# Altium PCB Memory_SD_Card.PcbDoc
Units mil, origin at the board's own origin, x right, y up, seen from the top; angles counter-clockwise.
Board outline 5200 x 2300 mil, 2 copper layers (Top Layer, Bottom Layer), stack 61.756 mil thick; 20 components, 54 nets, 153 pads, 181 vias.
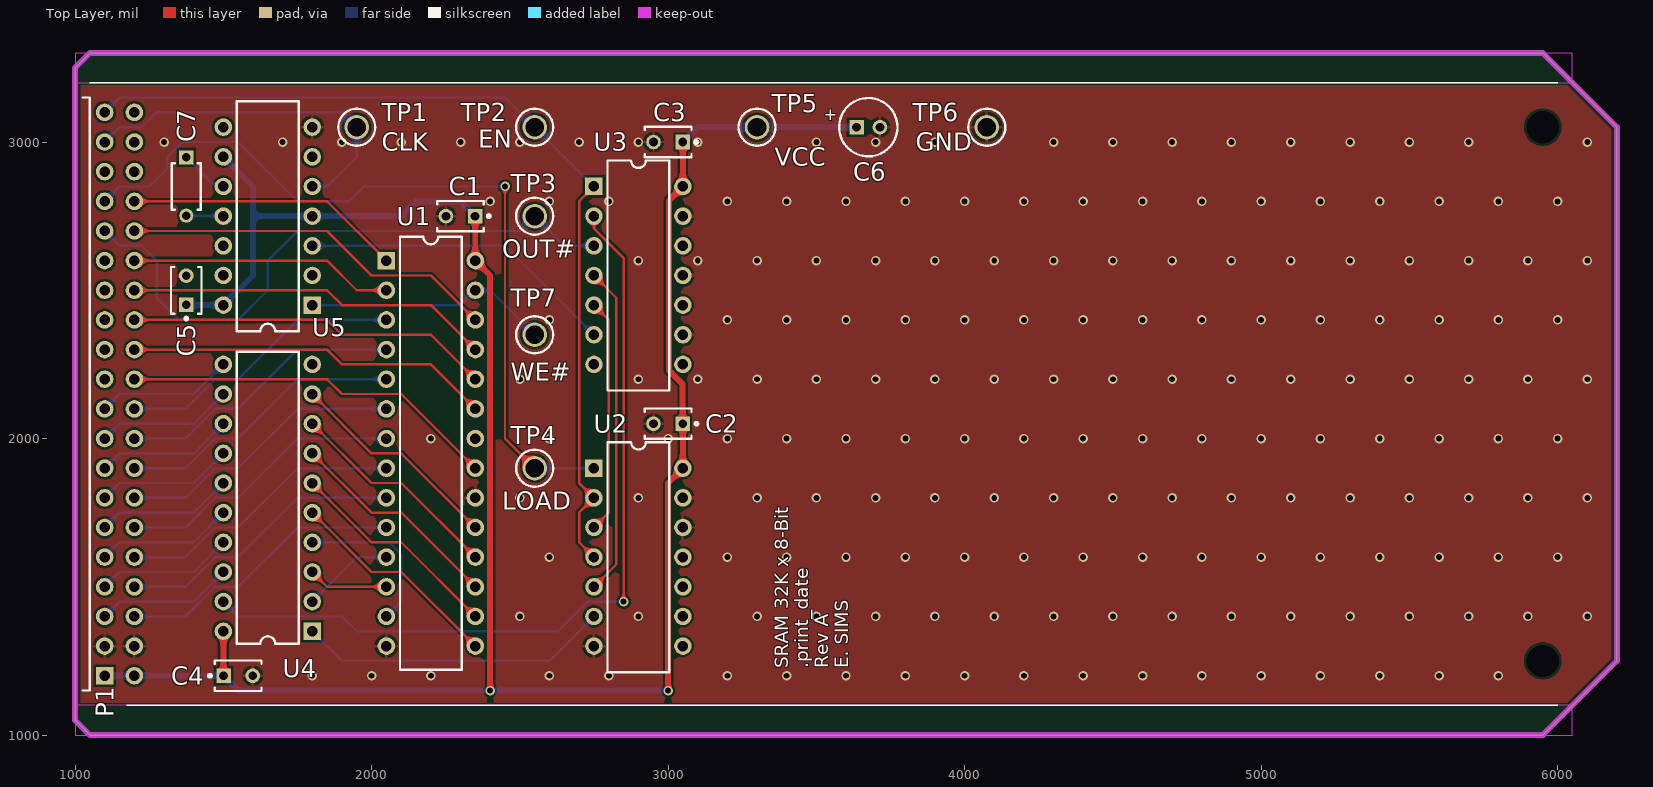
[diagram p0: Top Layer view]
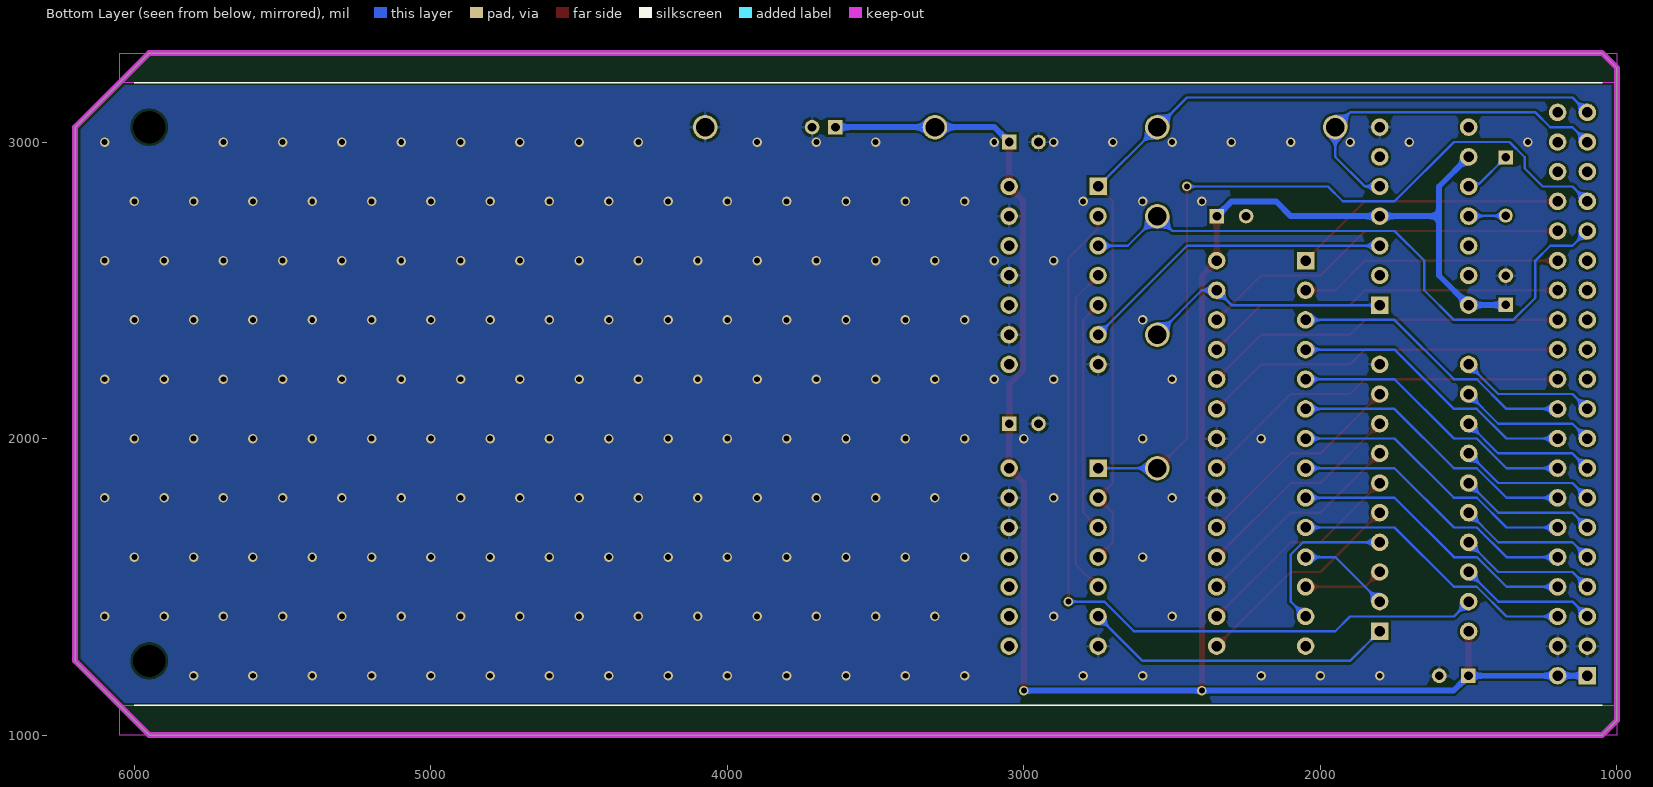
[diagram p1: Bottom Layer view, seen from below]

## Layer stack, top to bottom
Top Solder: solder mask 1, SM-001, Dk 4
Top Layer: signal copper 1.378
Dielectric 1: core 59, Core-043, Dk 4.3
Bottom Layer: signal copper 1.378
Bottom Solder: solder mask 1, SM-001, Dk 4

## Board outline
1000,1050 1050,1000 5950,1000 6200,1250 6200,3050 5950,3300 1050,3300 1000,3250

## Design rules (kind name [scope] priority, off if disabled: settings)
Clearance [All] p1: gap=8 ignorepadtopadclearanceinfootprint=FALSE
HoleSize [All] p1: absolutevalues=TRUE maxlimit=200 minlimit=12 maxpercent=80.000 minpercent=20.000
MinimumSolderMaskSliver [All] p1: minsoldermaskwidth=5
PolygonConnect [All] p1: thpad.connectstyle=Relief thpad.reliefconductorwidth=10 thpad.reliefentries=4 thpad.polygonreliefangle="90 Angle" thpad.airgapwidth=10 smdpad.connectstyle=Relief smdpad.reliefconductorwidth=10 smdpad.reliefentries=4 smdpad.polygonreliefangle="90 Angle" smdpad.airgapwidth=10 via.connectstyle=Direct via.reliefconductorwidth=10 via.reliefentries=4 via.polygonreliefangle="90 Angle" via.airgapwidth=10
RoutingVias [All] p1: holewidth=28 width=50 viastyle="Through Hole" minholewidth=28 minwidth=50 maxholewidth=28 maxwidth=50
SilkToSilkClearance [All] p1: silktosilkclearance=5
SilkToSolderMaskClearance [IsPad] p1: minsilkscreentomaskgap=5 clearancetoexposedcopper=TRUE
SolderMaskExpansion [All] p1: expansion=4 istentingtop=FALSE
Width [All] p1: maxlimit=20 minlimit=8 preferedwidth=8 minimp=50.000000 maximp=50.000000 favimp=50.000000
26 further rules are at their usual default settings.

## Classes and differential pairs
net class ADDR[0..14]: ADDR0 ADDR1 ADDR2 ADDR3 ADDR4 ADDR5 ADDR6 ADDR7 ADDR8 ADDR9 ADDR10 ADDR11 ADDR12 ADDR13 ADDR14
net class BUS[0..7]: BUS0 BUS1 BUS2 BUS3 BUS4 BUS5 BUS6 BUS7
component class MEM: C1 C2 C3 C4 C5 C7 TP7 U1 U2 U3 U4 U5
component class Top: C6 P1 TP1 TP2 TP3 TP4 TP5 TP6

## Components (designator, comment, footprint, x,y, rotation, side; value= is the part's Value field where it differs from the comment)
C1 "K104K15X7RF5TL2" VISH-K104K15X7RF5TL2 2300,2750 r180 top
C2 "K104K15X7RF5TL2" VISH-K104K15X7RF5TL2 3000,2050 r180 top
C3 "K104K15X7RF5TL2" VISH-K104K15X7RF5TL2 3000,3000 r180 top
C4 "K104K15X7RF5TL2" VISH-K104K15X7RF5TL2 1550,1200 r0 top
C5 "K104K15X7RF5TL2" VISH-K104K15X7RF5TL2 1375,2500 r90 top
C6 "Cap Pol5" C5x7 3675,3050 r0 top value=10uF
C7 "RDE5C1H220J0M1H03A" FP-RDE0M1-MFG 1375,2850 r270 top
P1 "Header 20X2H" HDR2X20H 1100,1200 r90 top locked
TP1 "CLK" KSTN-5011_V 1950,3050 r0 top
TP2 "EN" KSTN-5011_V 2550,3050 r0 top
TP3 "OUT#" KSTN-5011_V 2550,2750 r0 top
TP4 "LOAD" KSTN-5011_V 2550,1900 r0 top
TP5 "VCC" KSTN-5011_V 3300,3050 r0 top
TP6 "GND" KSTN-5011_V 4075,3050 r0 top
TP7 "WE#" KSTN-5011_V 2550,2350 r0 top
U1 "71256SA20TPG" JT028 2200,1950 r270 top
U2 "SN74LS08N" N014 2900,1600 r270 top
U3 "SN74LS04N" N014 2900,2550 r270 top
U4 "SN74LS245N" N020 1650,1800 r90 top
U5 "SN74121N" N014 1650,2750 r90 top

## Footprints (in the part's own frame and the unit in brackets; to place one, negate y for a bottom-side part, rotate by r counter-clockwise, add the part's x,y. Pads: shape width x height; smd on the part's side, far side on the other; paste and mask are expansions set on the pad)
C5x7 [mm] "Capacitor; 2 Leads"
  rect 1.25x1.25 hole 0.75: 1(-1,0)
  round 1.25 hole 0.75: 2(1,0)
  silkscreen extent -2.5,-2.5 2.5,2.5, body extent -2.5,-2.5 2.5,2.5, height 7
FP-RDE0M1-MFG [mm]
  rect 1.2x1.2 hole 0.7 paste-1000 mask+0: 1(-2.5,0)
  round 1.2 hole 0.7 paste-1000 mask+0: 2(2.5,0)
  silkscreen extent -2,-1.25 2,1.25, body extent -3.2,-1.35 3.2,1.35, height 0.25
HDR2X20H [mm] "Connector; Header; 20x2 Position; Right Angle"
  rect 1.5x1.5 hole 0.9: 1(0,0)
  round 1.5 hole 0.9: 2(0,-2.54) 3(2.54,0) 4(2.54,-2.54) 5(5.08,0) 6(5.08,-2.54) 7(7.62,0) 8(7.62,-2.54) 9(10.16,0) 10(10.16,-2.54) 11(12.7,0) 12(12.7,-2.54) 13(15.24,0) 14(15.24,-2.54) 15(17.78,0) 16(17.78,-2.54) 17(20.32,0) 18(20.32,-2.54) 19(22.86,0) 20(22.86,-2.54) 21(25.4,0) 22(25.4,-2.54) 23(27.94,0) 24(27.94,-2.54) 25(30.48,0) 26(30.48,-2.54) 27(33.02,0) 28(33.02,-2.54) 29(35.56,0) 30(35.56,-2.54) 31(38.1,0) 32(38.1,-2.54) 33(40.64,0) 34(40.64,-2.54) 35(43.18,0) 36(43.18,-2.54) 37(45.72,0) 38(45.72,-2.54) 39(48.26,0) 40(48.26,-2.54)
  silkscreen extent -1.27,1.27 49.53,1.91
JT028 [mm] "DIP; 28 Leads; Row Spacing 7.62 mm; Pitch 2.54 mm"
  rect 1.5x1.5 hole 0.9: 1(-16.51,-3.81)
  round 1.5 hole 0.9: 2(-13.97,-3.81) 3(-11.43,-3.81) 4(-8.89,-3.81) 5(-6.35,-3.81) 6(-3.81,-3.81) 7(-1.27,-3.81) 8(1.27,-3.81) 9(3.81,-3.81) 10(6.35,-3.81) 11(8.89,-3.81) 12(11.43,-3.81) 13(13.97,-3.81) 14(16.51,-3.81) 15(16.51,3.81) 16(13.97,3.81) 17(11.43,3.81) 18(8.89,3.81) 19(6.35,3.81) 20(3.81,3.81) 21(1.27,3.81) 22(-1.27,3.81) 23(-3.81,3.81) 24(-6.35,3.81) 25(-8.89,3.81) 26(-11.43,3.81) 27(-13.97,3.81) 28(-16.51,3.81)
  silkscreen extent -18.55,-2.65 18.55,2.65
KSTN-5011_V [mm] "Test Point, Dia 3.17mm"
  round 2.1 hole 1.6: 1(0,0)
  silkscreen extent -1.59,-1.58 1.59,1.58, body extent -1.59,-1.59 1.59,1.59, height 8.13
N014 [mm] "DIP; 14 Leads; Row Spacing 7.62 mm; Pitch 2.54 mm"
  rect 1.5x1.5 hole 0.9: 1(-7.62,-3.81)
  round 1.5 hole 0.9: 2(-5.08,-3.81) 3(-2.54,-3.81) 4(0,-3.81) 5(2.54,-3.81) 6(5.08,-3.81) 7(7.62,-3.81) 8(7.62,3.81) 9(5.08,3.81) 10(2.54,3.81) 11(0,3.81) 12(-2.54,3.81) 13(-5.08,3.81) 14(-7.62,3.81)
  silkscreen extent -9.85,-2.65 9.85,2.65, body extent -9.15,-5.08 9.15,5.12, height 7.88
N020 [mm] "DIP; 20 Leads; Row Spacing 7.62 mm; Pitch 2.54 mm"
  rect 1.5x1.5 hole 0.9: 1(-11.43,-3.81)
  round 1.5 hole 0.9: 2(-8.89,-3.81) 3(-6.35,-3.81) 4(-3.81,-3.81) 5(-1.27,-3.81) 6(1.27,-3.81) 7(3.81,-3.81) 8(6.35,-3.81) 9(8.89,-3.81) 10(11.43,-3.81) 11(11.43,3.81) 12(8.89,3.81) 13(6.35,3.81) 14(3.81,3.81) 15(1.27,3.81) 16(-1.27,3.81) 17(-3.81,3.81) 18(-6.35,3.81) 19(-8.89,3.81) 20(-11.43,3.81)
  silkscreen extent -12.5,-2.65 12.5,2.65, body extent -13.08,-5.08 13.08,5.12, height 7.88
VISH-K104K15X7RF5TL2 [mm] "THD, 2-Leads, Body 4x2.6mm"
  rect 1.25x1.25 hole 0.75: 1(-1.25,0)
  round 1.25 hole 0.75: 2(1.25,0)
  silkscreen extent -2.55,-1.3 2,1.3, body extent -2,-1.3 2,1.3, height 5.6

## Part data
C1 C2 C3 C4 C5: library part CMP-2000-06508-1, "Ceramic Capacitor, 100 nF, +/- 10%, 50 V, -55 to 125 degC, 2-Pin THD, RoHS, Tape and Reel", Capacitance=0.1µF, Manufacturer=Vishay, Operating Temperature=-55°C~125°C, Package / Case=Radial, Package Description="2-Pin Through Hole Device, Body 4 x 2.6 mm", Ratings=-, Standard Package=1, Temperature Coefficient=X7R, Tolerance=±10%, Voltage - Rated=50V, Applications=GeneralPurpose, Catalog Drawings=Mono-KapSide2-15_5.58Mono-KapSide1_15, Category=Capacitors, Datasheet URL=http://www.vishay.com/docs/45171/kseries.pdf, Datasheet Version=08/2013, Family=CeramicCapacitors, Features=-, Height - Seated (Max)="0.220\"(5.58mm)", Lead Spacing="0.098\"(2.50mm)", Lead Style=Straight, Manufacturer URL=http://www.vishay.com/, Mounting Technology=ThroughHole, Mounting Type=ThroughHole, Online Catalog=Mono-Kap™Series, Other Names=BC1084CT, Package Reference=K104K15X7RF5TL2, Packaging=CutTape(CT), Series=Mono-Kap™K, Size / Dimension="0.157\"Lx0.098\"W(4.00mmx2.50mm)", Thickness (Max)=-
C6: "Polarized Capacitor", LatestRevisionDate=17-Jul-2002, LatestRevisionNote="Re-released for DXP Platform.", PackageDescription="Polarized Capacitor; 2 Leads", PackageReference=POLAR0.8, Published=8-Jun-2000, Publisher="Altium Limited"
C7: library part CMP-06035-012716-1, "Ceramic Capacitor 22pF ±5% 50V C0G Radial", Capacitance=22pF, Case/Package=Radial, Dielectric=C0G, Max Operating Temperature=125°C, Min Operating Temperature=-55°C, Package Quantity=2000, Resistor Type=Ceramic, Tolerance=5%, Voltage Rating=50V, Height=3.5mm, Height - Seated (Max)=0.236inch, Lead Diameter=0.5mm, Lead Pitch=0.197inch, Length=0.157inch, Mount="Through Hole", Packaging="Tape and Reel", Termination=Radial, Voltage Rating (DC)=50V, Width=3.5mm
P1: "Header, 20-Pin, Dual row, Right Angle", LatestRevisionDate=17-Jul-2002, LatestRevisionNote="Re-released for DXP Platform.", Publisher="Altium Limited", System=Connector
TP1 TP2 TP3 TP4 TP5 TP6 TP7: library part TP
U2: "Quadruple 2-Input Positive-AND Gate", ComponentLink1Description="Manufacturer Link", ComponentLink1URL=http://www.ti.com/, ComponentLink2Description=Datasheet, ComponentLink2URL=http://www-s.ti.com/sc/ds/SN74LS08.pdf, DatasheetVersion=Mar-1988, LatestRevisionDate=04-Mar-2005, LatestRevisionNote="Stylized 3D Model Added.", PackageDescription="DIP; 14 Leads; Row Spacing 7.62 mm; Pitch 2.54 mm", PackageReference=N014, PackageVersion=Oct-1995, Published=8-Jun-2000, Publisher="Altium Limited"
U3: "Hex Inverter", ComponentLink1Description="Manufacturer Link", ComponentLink1URL=http://www.ti.com/, ComponentLink2Description=Datasheet, ComponentLink2URL=http://www-s.ti.com/sc/ds/sn74ls04.pdf, DatasheetVersion=Mar-1988, LatestRevisionDate=04-Mar-2005, LatestRevisionNote="Stylized 3D Model Added.", PackageDescription="DIP; 14 Leads; Row Spacing 7.62 mm; Pitch 2.54 mm", PackageReference=N014, PackageVersion=Oct-1995, Published=8-Jun-2000, Publisher="Altium Limited"
U4: "Octal Bus Transceiver with 3-State Outputs", ComponentLink1Description="Manufacturer Link", ComponentLink1URL=http://www.ti.com/, ComponentLink2Description=Datasheet, ComponentLink2URL=http://www-s.ti.com/sc/ds/sn74ls245.pdf, DatasheetVersion=Mar-1988, LatestRevisionDate=04-Mar-2005, LatestRevisionNote="Stylized 3D Model Added.", PackageDescription="DIP; 20 Leads; Row Spacing 7.62 mm; Pitch 2.54 mm", PackageReference=N020, PackageVersion=Oct-1995, Published=8-Jun-2000, Publisher="Altium Limited"
U5: "Monostable Multivibrator with Schmitt-Trigger Inputs", ComponentLink1Description="Manufacturer Link", ComponentLink1URL=http://www.ti.com/, ComponentLink2Description=Datasheet, ComponentLink2URL=http://www-s.ti.com/sc/ds/sn74121.pdf, DatasheetVersion=Mar-1988, LatestRevisionDate=04-Mar-2005, LatestRevisionNote="Stylized 3D Model Added.", Note="Pins No 2,8,12 and 13 are not connected and not drawn", PackageDescription="DIP; 14 Leads; Row Spacing 7.62 mm; Pitch 2.54 mm", PackageReference=N014, PackageVersion=Oct-1995, Published=8-Jun-2000, Publisher="Altium Limited"

## Free pads (board coordinates)
  round 0 hole 109: ""(5950,1250) ""(5950,3050)

## Via types
v1: diameter 32, hole 20, Top Layer to Bottom Layer, tented both sides, 181 vias

## Nets (pads, with @x,y where several pads share a name; then routed paths per layer and width w, separated by ;. In a path a pad name is that pad's centre, name@x,y a point inside that pad or via, vN(x,y) a via of type N, cw(c..) or ccw(c..) an arc to the next point about the centre after c; other vN are vias at no path point)
ADDR0: P1.6 U1.10 | length 974.3
  Bottom Layer w8: P1.6 1372.63,1400 1472.63,1500 1550,1500 1750,1700 U1.10
ADDR1: P1.8 U1.9 | length 974.3
  Bottom Layer w8: P1.8 1372.63,1500 1472.63,1600 1550,1600 1750,1800 U1.9
ADDR2: P1.10 U1.8 | length 974.3
  Bottom Layer w8: P1.10 1372.63,1600 1472.63,1700 1550,1700 1750,1900 U1.8
ADDR3: P1.12 U1.7 | length 974.3
  Bottom Layer w8: P1.12 1372.63,1700 1472.63,1800 1550,1800 1750,2000 U1.7
ADDR4: P1.14 U1.6 | length 974.3
  Bottom Layer w8: P1.14 1372.63,1800 1472.63,1900 1550,1900 1750,2100 U1.6
ADDR5: P1.16 U1.5 | length 974.3
  Bottom Layer w8: P1.16 1372.63,1900 1472.63,2000 1550,2000 1750,2200 U1.5
ADDR6: P1.18 U1.4 | length 974.3
  Bottom Layer w8: P1.18 1372.63,2000 1472.63,2100 1550,2100 1750,2300 U1.4
ADDR7: P1.20 U1.3 | length 974.3
  Bottom Layer w8: P1.20 1372.63,2100 1472.63,2200 1550,2200 1750,2400 U1.3
ADDR8: P1.22 U1.21 | length 1274.3
  Top Layer w8: P1.22 1850,2200 1900,2150 2100,2150 U1.21
ADDR9: P1.24 U1.23 | length 1232.8
  Top Layer w8: P1.24 1850,2300 1900,2250 2200,2250 U1.23
ADDR10: P1.26 U1.24 | length 1232.8
  Top Layer w8: P1.26 1850,2400 1900,2350 2200,2350 U1.24
ADDR11: P1.28 U1.25 | length 1232.8
  Top Layer w8: P1.28 1850,2500 1900,2450 2200,2450 U1.25
ADDR12: P1.30 U1.2 | length 891.4
  Top Layer w8: P1.30 1850,2600 1950,2500 U1.2
ADDR13: P1.32 U1.26 | length 1274.3
  Top Layer w8: P1.32 1850,2700 2000,2550 2200,2550 U1.26
ADDR14: P1.34 U1.1 | length 932.8
  Top Layer w8: P1.34 1850,2800 U1.1
ADDR15: P1.36
ADDR16: P1.38
ADDR17: P1.40
ADDR18: P1.21
ADDR19: P1.23
BUS0: P1.5 U4.18 | length 462.1
  Bottom Layer w8: P1.5 1150,1450 1400,1450 U4.18
BUS1: P1.7 U4.17 | length 462.1
  Bottom Layer w8: P1.7 1150,1550 1400,1550 U4.17
BUS2: P1.9 U4.16 | length 462.1
  Bottom Layer w8: P1.9 1150,1650 1400,1650 U4.16
BUS3: P1.11 U4.15 | length 462.1
  Bottom Layer w8: P1.11 1150,1750 1400,1750 U4.15
BUS4: P1.13 U4.14 | length 462.1
  Bottom Layer w8: P1.13 1150,1850 1400,1850 U4.14
BUS5: P1.15 U4.13 | length 462.1
  Bottom Layer w8: P1.15 1150,1950 1400,1950 U4.13
BUS6: P1.17 U4.12 | length 462.1
  Bottom Layer w8: P1.17 1150,2050 1400,2050 U4.12
BUS7: P1.19 U4.11 | length 462.1
  Bottom Layer w8: P1.19 1150,2150 1400,2150 U4.11
CLK: P1.37 TP1.1 U5.5 | length 1203.6
  Bottom Layer w8: P1.37 1150,3050 1225,3050 1275,3100 1900,3100 TP1.1 1950,2950 1850,2850 U5.5
EN: P1.39 TP2.1 U2.2 U2.4 U3.1 | length 3127.8
  Top Layer w8: U2.4 2700,1650 2700,1750 U2.2 2700,1850 2700,2800 U3.1
  Bottom Layer w8: P1.39 1150,3150 2450,3150 TP2.1 U3.1
GND: C1.2 C2.2 C3.2 C4.2 C5.2 C6.2 P1.3 P1.4 TP6.1 U1.14 U1.20 U1.22 U2.7 U2.12 U2.13 U3.7 U3.9 U3.11 U3.13 U4.10 U5.7
  other v1: 1800,1200 2000,1200 2200,1200 2600,1200 2800,1200 3200,1200 3400,1200 3600,1200 3800,1200 4000,1200 4200,1200 4400,1200 4600,1200 4800,1200 5000,1200 5200,1200 5400,1200 5600,1200 5800,1200 2500,1400 2900,1400 3300,1400 3500,1400 3700,1400 3900,1400 4100,1400 4300,1400 4500,1400 4700,1400 4900,1400 5100,1400 5300,1400 5500,1400 5700,1400 5900,1400 6100,1400 2600,1600 3200,1600 3400,1600 3600,1600 3800,1600 4000,1600 4200,1600 4400,1600 4600,1600 4800,1600 5000,1600 5200,1600 5400,1600 5600,1600 5800,1600 6000,1600 2500,1800 2900,1800 3300,1800 3500,1800 3700,1800 3900,1800 4100,1800 4300,1800 4500,1800 4700,1800 4900,1800 5100,1800 5300,1800 5500,1800 5700,1800 5900,1800 6100,1800 2200,2000 2600,2000 3000,2000 3200,2000 3400,2000 3600,2000 3800,2000 4000,2000 4200,2000 4400,2000 4600,2000 4800,2000 5000,2000 5200,2000 5400,2000 5600,2000 5800,2000 6000,2000 2500,2200 2900,2200 3100,2200 3300,2200 3500,2200 3700,2200 3900,2200 4100,2200 4300,2200 4500,2200 4700,2200 4900,2200 5100,2200 5300,2200 5500,2200 5700,2200 5900,2200 6100,2200 2600,2400 3200,2400 3400,2400 3600,2400 3800,2400 4000,2400 4200,2400 4400,2400 4600,2400 4800,2400 5000,2400 5200,2400 5400,2400 5600,2400 5800,2400 6000,2400 2900,2600 3100,2600 3300,2600 3500,2600 3700,2600 3900,2600 4100,2600 4300,2600 4500,2600 4700,2600 4900,2600 5100,2600 5300,2600 5500,2600 5700,2600 5900,2600 6100,2600 2400,2800 2600,2800 2800,2800 3200,2800 3400,2800 3600,2800 3800,2800 4000,2800 4200,2800 4400,2800 4600,2800 4800,2800 5000,2800 5200,2800 5400,2800 5600,2800 5800,2800 6000,2800 1300,3000 1700,3000 1900,3000 2100,3000 2300,3000 2500,3000 2700,3000 2900,3000 3100,3000 3500,3000 3700,3000 3900,3000 4300,3000 4500,3000 4700,3000 4900,3000 5100,3000 5300,3000 5500,3000 5700,3000 6100,3000
LOAD: P1.33 TP4.1 U2.1 | length 2749.9
  Top Layer w8: v1(2450,2850) 2450,2000 TP4.1
  Bottom Layer w8: P1.33 1150,2850 1250,2850 1310.7,2910.7 1310.7,2948.34 1362.36,3000 1550,3000 1750,2800 1925,2800 1975,2850 v1(2450,2850) ; TP4.1 U2.1
NetC7_1: C7.1 U5.10 | length 165.8
  Bottom Layer w8: C7.1 1463.66,2859.77 1490.23,2859.77 U5.10
NetC7_2: C7.2 U5.11 | length 125.7
  Bottom Layer w8: C7.2 1375.79,2750.79 1499.21,2750.79 U5.11
NetU2_3: U2.3 U3.5 | length 791.4
  Top Layer w8: U2.3 2800,1750 2800,2400 U3.5
NetU2_5: U2.5 U3.4 | length 1112.1
  Top Layer w8: U2.5 2825,1575 2825,2475 U3.4
NetU2_6: U2.6 U4.1 | length 1053.6
  Bottom Layer w8: U4.1 1900,1250 2600,1250 U2.6
NetU3_2: U3.2 U4.19 | length 2774.3
  Top Layer w8: U3.2 2750.26,2749.74 2750.26,2708.47 2850,2608.73 v1(2850,1450)
  Bottom Layer w8: U4.19 1550,1400 1900,1400 1950,1350 2629.08,1350 2729.08,1450 v1(2850,1450)
NetU3_6: U3.6 U5.3 | length 1074.3
  Bottom Layer w8: U5.3 2450,2650 U3.6
OUT#: P1.31 TP3.1 U3.3 | length 2092.5
  Bottom Layer w8: P1.31 1150,2650 1225,2650 1275,2600 1275,2475 1350,2400 1550,2400 1650,2500 1650,2600 1750,2700 2500,2700 TP3.1 2650,2650 U3.3
REG0: U1.11 U4.2 | length 312.1
  Bottom Layer w8: U4.2 1950,1600 U1.11
REG1: U1.12 U4.3 | length 270.7
  Top Layer w8: U4.3 1850,1500 U1.12
REG2: U1.13 U4.4 | length 546.5
  Bottom Layer w8: U4.4 2058.73,1650 2100,1608.73 2100,1450 U1.13
REG3: U1.15 U4.5 | length 736.4
  Top Layer w8: U4.5 2000,1550 2100,1550 U1.15
REG4: U1.16 U4.6 | length 736.4
  Top Layer w8: U4.6 2000,1650 2100,1650 U1.16
REG5: U1.17 U4.7 | length 736.4
  Top Layer w8: U4.7 2000,1750 2100,1750 U1.17
REG6: U1.18 U4.8 | length 736.4
  Top Layer w8: U4.8 2000,1850 2100,1850 U1.18
REG7: U1.19 U4.9 | length 736.4
  Top Layer w8: U4.9 2000,1950 2100,1950 U1.19
RFU_M25: P1.25
RFU_M27: P1.27
RFU_M29: P1.29
RST#: P1.35
VCC: C1.1 C2.1 C3.1 C4.1 C5.1 C6.1 P1.1 P1.2 TP5.1 U1.28 U2.14 U3.14 U4.20 U5.4 U5.9 U5.14 | length 7708.4
  Top Layer w20: U4.20 1500.39,1349.61 1500.39,1200.39 C4.1 ; C1.1 2349.61,2749.61 2349.61,2600.39 U1.28 2400,2550 v1(2400,1150) ; v1(3000,1150) 3000,1850 U2.14 3049.61,1900.39 3049.61,2049.61 C2.1 3049.21,2183.57 3002.47,2230.31 3002.47,2802.47 U3.14 3049.61,2850.39 3049.61,2999.61 C3.1
  Bottom Layer w20: P1.1 P1.2 C4.1 1550.79,1150 v1(2400,1150) v1(3000,1150) ; C5.1 1375.39,2450.39 1499.61,2450.39 U5.14 1600,2550 1600,2750 ; U5.9 1600,2850 1600,2750 ; C1.1 2299.21,2800 2150,2800 2100,2750 1600,2750 ; C3.1 3099.21,3050 TP5.1 C6.1
WE#: TP7.1 U1.27 U5.1 | length 832.8
  Bottom Layer w8: U5.1 2300,2450 U1.27 2400,2500 TP7.1
pads on no net: U2.8 U2.9 U2.10 U2.11 U3.8 U3.10 U3.12 U5.2 U5.6 U5.8 U5.12 U5.13

## Polygon pours and split planes (outlines as drawn)
GND on Top Layer "GND_L01_P000" (solid, remove dead copper, pour order 0): 1000,1000 1000,3300 6200,3300 6200,1000
GND on Bottom Layer "GND_L02_P001" (solid, remove dead copper, pour order 1): 1000,1000 1000,3300 6200,3300 6200,1000

## Keep-outs
Top Layer:
  rectangle: 1000,3200 6050,3300
  rectangle: 1000,1000 6050,1100
Bottom Layer:
  rectangle: 1000,3200 6050,3300
  rectangle: 1000,1000 6050,1100
Keep-Out Layer:
  the board outline again, w20

## Silkscreen, mask and mechanical layers (free items; w line width, h text height)
Top Overlay:
  lines w5: 1050,3200 6000,3200 ; 1175,1100 6000,1100
  text "SRAM 32K x 8-Bit / .print_date / Rev A / E. SIMS" at 3606.91,1225 h45 r90
Bottom Overlay:
  lines w5: 1050,1100 6000,1100 ; 1050,3200 6000,3200

## Text inside footprints (layer, text, board x,y; h text height)
C6: Top Overlay "+" at 3570.22,3109.36 h40 r180